# Altium PCB LM2587.PcbDoc
Units mm, origin at the board's own origin, x right, y up, seen from the top; angles counter-clockwise.
Board outline 56.6 x 28.6 mm, 2 copper layers (Top Layer, Bottom Layer), stack 1.571 mm thick; 11 components, 7 nets, 30 pads, 41 vias.
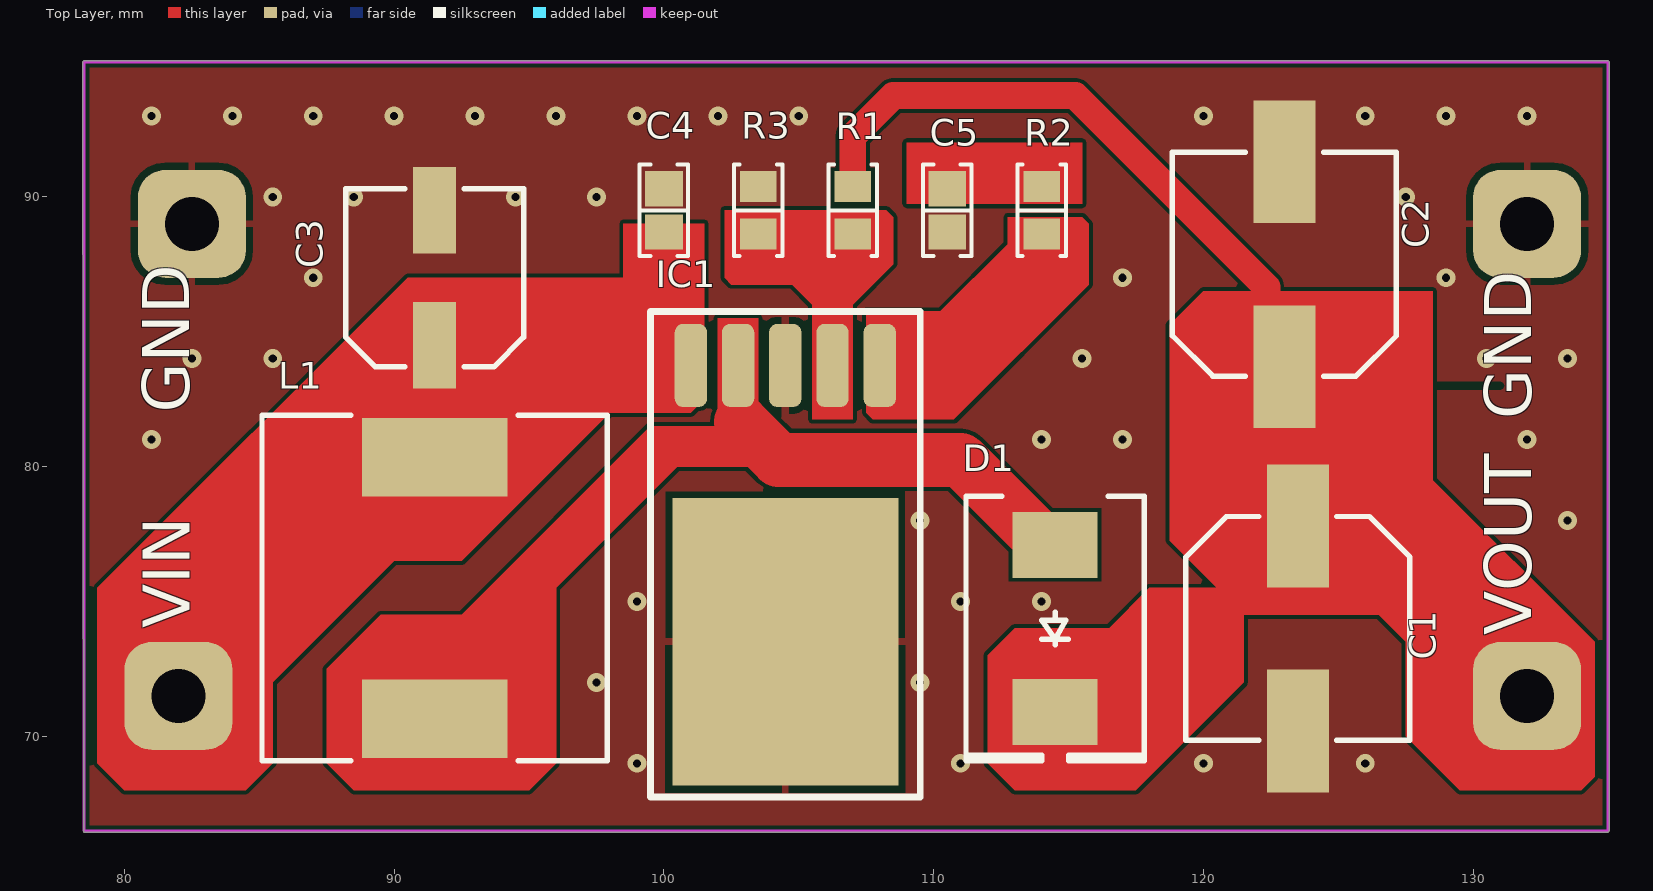
[diagram p0: Top Layer view]
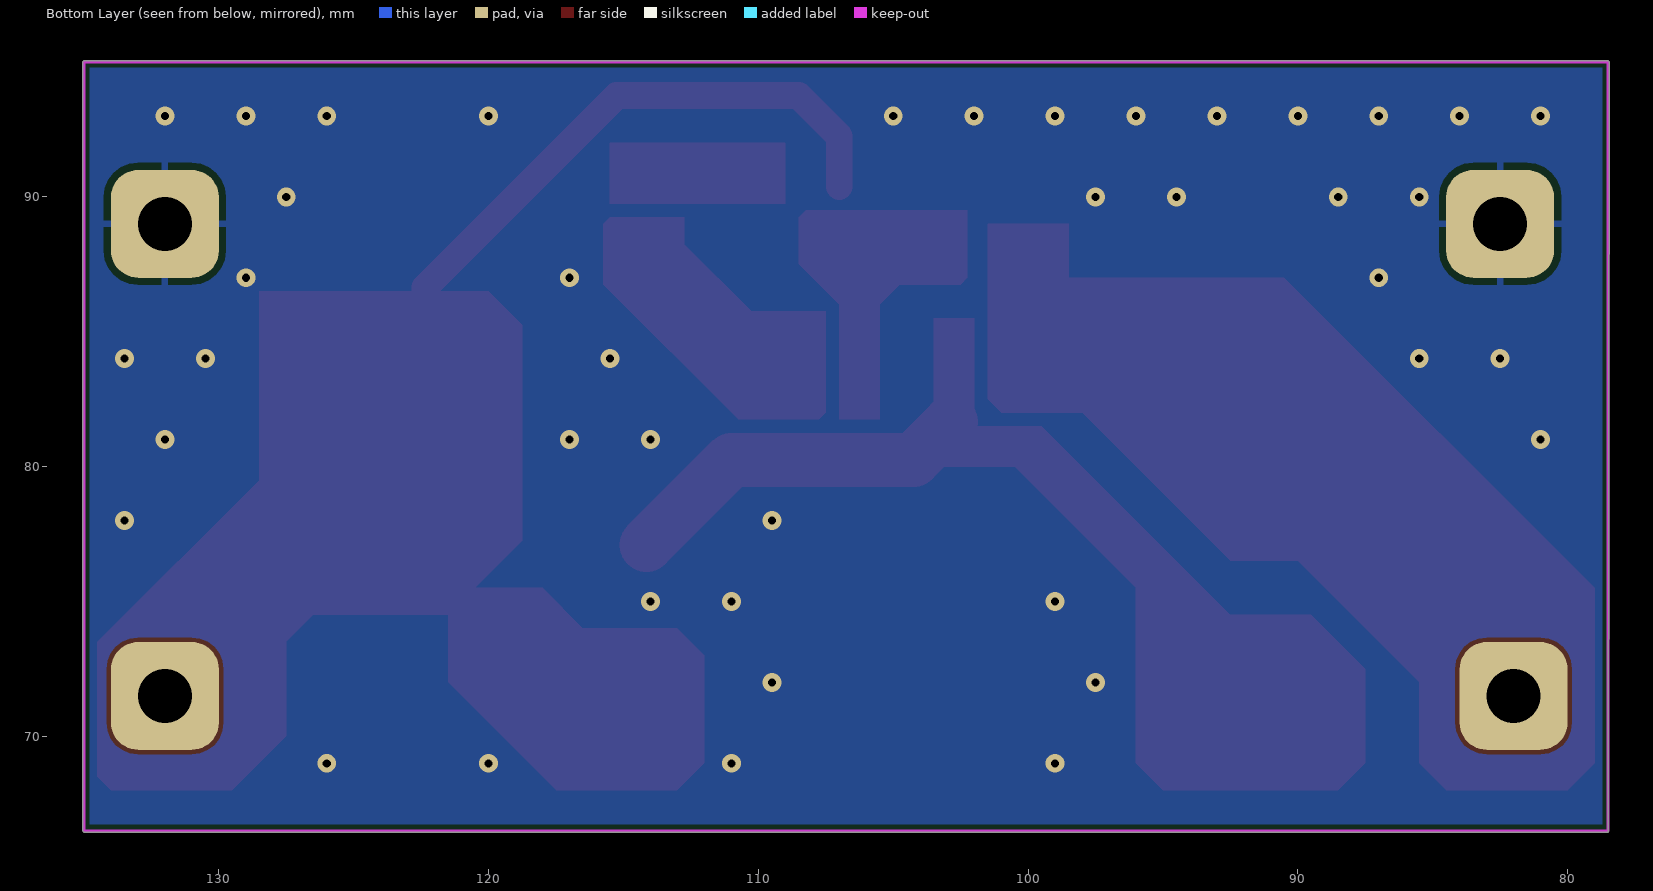
[diagram p1: Bottom Layer view, seen from below]
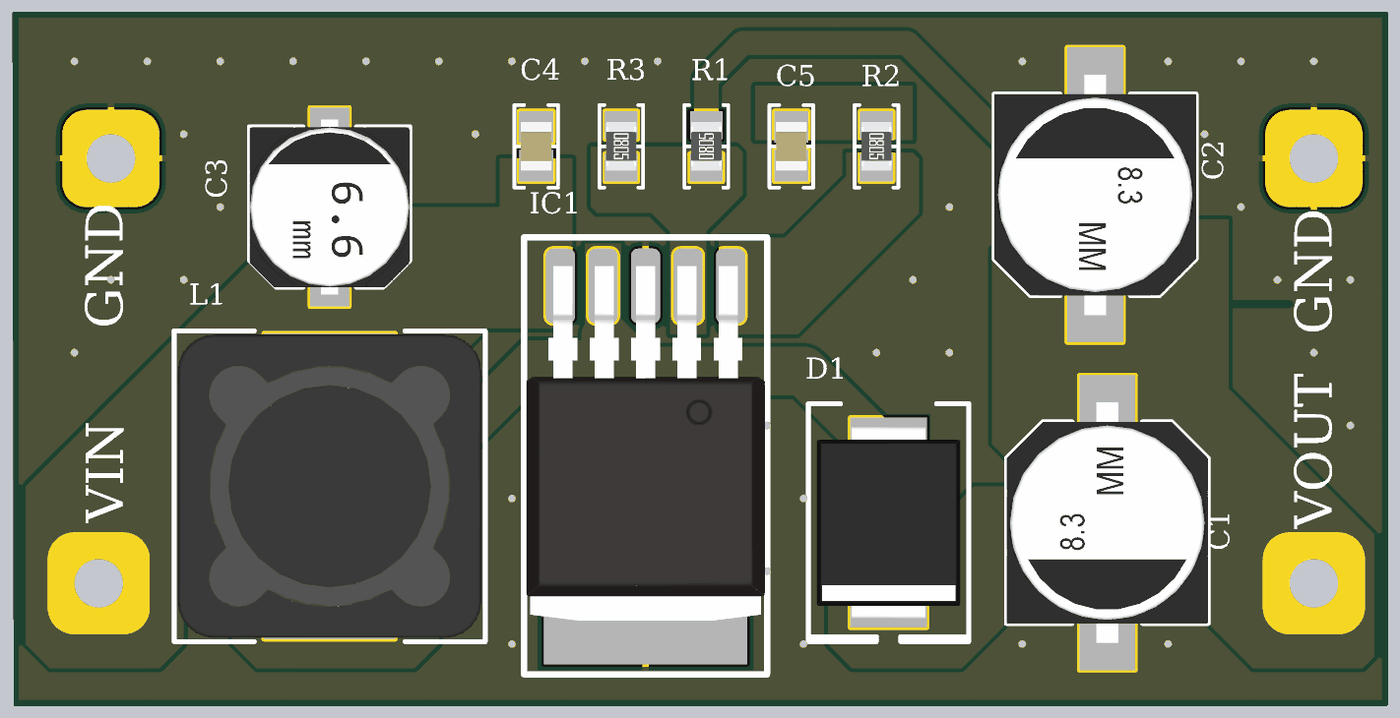
[diagram p2: 3D render of the assembled board from above, using the file's embedded part models]

## Layer stack, top to bottom
Top Solder: solder mask 0.0102, Solder Resist, Dk 3.5
Top Layer: signal copper 0.0356
Dielectric 1: dielectric 1.5, FR-4, Dk 4.8
Bottom Layer: signal copper 0.0356
Bottom Solder: solder mask 0.0102, Solder Resist, Dk 3.5

## Board outline
78.5,66.45 135,66.45 135.05,66.5 135.05,95 135,95.05 78.5,95.05 78.45,95

## Design rules (kind name [scope] priority, off if disabled: settings)
Clearance [All] p1: gap=0.152 ignorepadtopadclearanceinfootprint=FALSE
PolygonConnect [All] p1: connectstyle=Direct reliefconductorwidth=0.254 reliefentries=4 polygonreliefangle="90 Angle" airgapwidth=0.254
RoutingVias [All] p1: holewidth=0.711 width=1.27 viastyle="Through Hole" minholewidth=0.711 minwidth=1.27 maxholewidth=0.711 maxwidth=1.27
SolderMaskExpansion [All] p1: expansion=0.102 istentingtop=FALSE
SupplyNets "Schematic Supply Nets_2" [InNet('VOUT')] p1: voltage=0.000
SupplyNets "Schematic Supply Nets_1" [InNet('GND')] p2: voltage=0.000
SupplyNets "Schematic Supply Nets" [InNet('VIN')] p3: voltage=0.000
Width [All] p1: maxlimit=3 minlimit=0.152 preferedwidth=0.5
30 further rules are at their usual default settings.

## Components (designator, comment, footprint, x,y, rotation, side; value= is the part's Value field where it differs from the comment)
C1 "100 µF" "CAP ALSMD 8.3MM H10.5MM" 123.5,74 r270 top
C2 "100 µF" "CAP ALSMD 8.3MM H10.5MM" 123,87.5 r90 top
C3 "56 µF" "CAP ALSMD 6.6MM H7.7MM" 91.5,87 r90 top
C4 "0.1µF" "CAP 0805_2012" 100,89.5 r270 top
C5 "0.068 µF" "CAP 0805_2012" 110.5,89.5 r90 top
D1 "SURS8360T3G" "DO214AB SMC" 114.5,74 r270 top
IC1 "LM2587" D2PAK 104.5,75 r180 top
L1 "100 µH" "BOURNS SRR1280" 91.5,75.5 r270 top
R1 "56 kOhms" "RES 0805_2012" 107,89.5 r90 top
R2 "3 kOhms" "RES 0805_2012" 114,89.5 r270 top
R3 "2 kOhms" "RES 0805_2012" 103.5,89.5 r270 top

## Footprints (in the part's own frame and the unit in brackets; to place one, negate y for a bottom-side part, rotate by r counter-clockwise, add the part's x,y. Pads: shape width x height; smd on the part's side, far side on the other; paste and mask are expansions set on the pad)
"BOURNS SRR1280" [mm] "Precision Wire Wound Inductor, 2-Leads, Body 12.50x12.50mm, IPC Medium Density"
  rect 2.9x5.4 smd: 1(-4.85,0) 2(4.85,0)
  silkscreen extent -6.4,-6.4 6.4,6.4, body extent -6.25,-6.25 6.25,6.25, height 7.9
"CAP 0805_2012" [mm] "Chip Capacitor, 2-Leads, Body 2.00x1.20mm, IPC Medium Density"
  rect 1.3x1.4 smd: 1(-0.8,0) 2(0.8,0)
  silkscreen extent -1.7,-0.9 1.7,0.9, body extent -1,-0.64 1,0.64, height 1.26
"CAP ALSMD 6.6MM H7.7MM" [mm] "Aluminum Electrolytic Capacitor, Body 6.60x6.60x7.70mm, IPC Low Density"
  rect 3.2x1.6 smd: 1(-2.5,0) 2(2.5,0)
  silkscreen extent -3.3,-3.3 3.3,3.3, body extent -3.6,-3.3 3.6,3.3, height 7.7
"CAP ALSMD 8.3MM H10.5MM" [mm] "Aluminum Electrolytic Capacitor, Body 8.30x8.30x10.50mm, IPC Low Density"
  rect 4.55x2.3 smd: 1(-3.8,0) 2(3.8,0)
  silkscreen extent -4.15,-4.15 4.15,4.15, body extent -4.95,-4.15 4.95,4.15, height 10.5
D2PAK [mm] "LM2596 PACKAGE-263-5"
  rrect50% 1.2x3.075 smd: 1(-3.5,-8.75) 2(-1.75,-8.75) 3(0,-8.75) 4(1.75,-8.75) 5(3.5,-8.75)
  rect 8.38x10.66 smd: 3(0,1.5)
  silkscreen extent -5,-10.75 5,7.25, body extent -4.91,-9.56 4.91,5.04, height 4.22
"DO214AB SMC" [mm] "Molded Diode, 2-Leads, Body 6.85x5.90mm, IPC Medium Density"
  rect 2.45x3.15 smd: 1(-3.1,0) 2(3.1,0)
  silkscreen extent -4.9,-3.3 4.9,3.3, body extent -3.97,-2.95 3.97,2.95, height 2.6
"RES 0805_2012" [mm] "Chip Resistor, 2-Leads, Body 2.00x1.25mm, IPC Medium Density"
  rect 1.15x1.35 smd: 1(-0.875,0) 2(0.875,0)
  silkscreen extent -1.7,-0.9 1.7,0.9, body extent -1,-0.62 1,0.63, height 0.6

## Part data
C1 C2: library part 50SEV100M8X10.5, "CAP ALUM 100UF 20% 50V SMD", Device Package="Radial, Can - SMD", Lifetime @ Temp.="2000 Hrs @ 85°C", manufacturer=Rubycon, Operating Temperature="-40°C ~ 85°C", Ratings=AEC-Q200, Ripple Current @ Low Frequency="320 mA @ 120 Hz", Supplier Part Number 1=1189-3099-1-ND, Tolerance=±20%, Voltage - Rated="50 V", Applications=Automotive, Capacitance="100 µF", componentlink1description=Datasheet, componentlink1url=http://www.rubycon.co.jp/en/catalog/e_pdfs/aluminum/e_sev.pdf, componentlink2description="DigiKey Link", componentlink2url=https://www.digikey.com/en/products/detail/rubycon/50SEV100M8X10-5/3568700, Height - Seated (Max)="0.413\" (10.50mm)", lastupdated="3.06.2024 20:15:49", Lifecycle Status=Active, Minimum Order=1, Mounting Type="Surface Mount", Package / Case="Radial, Can - SMD", packaging=TapeAndReel, Part Number=50SEV100M8X10.5, Part Status=Active, partid=7462, Polarization=Polar, price=0.13, series=SEV, Size / Dimension="0.315\" Dia (8.00mm)", Supplier 1=DigiKey, Surface Mount Land Size="0.327\" L x 0.327\" W (8.30mm x 8.30mm)"
C3: library part 865080545010, "CAP ALUM 56UF 20% 35V SMD", Device Package="Radial, Can - SMD", Lifetime @ Temp.="2000 Hrs @ 105°C", manufacturer="Würth Elektronik", Operating Temperature="-55°C ~ 105°C", Ripple Current @ High Frequency="250 mA @ 100 kHz", Ripple Current @ Low Frequency="162.5 mA @ 120 Hz", Supplier Part Number 1=732-8509-1-ND, Tolerance=±20%, Voltage - Rated="35 V", Applications="General Purpose", Capacitance="56 µF", componentlink1description=Datasheet, componentlink1url=https://katalog.we-online.de/pbs/datasheet/865080545010.pdf, componentlink2description="DigiKey Link", componentlink2url=https://www.digikey.com/en/products/detail/würth-elektronik/865080545010/5728104, Height - Seated (Max)="0.303\" (7.70mm)", lastupdated="3.06.2024 20:16:17", Lifecycle Status=Active, Minimum Order=1, Mounting Type="Surface Mount", Package / Case="Radial, Can - SMD", packaging=TapeAndReel, Part Number=865080545010, Part Status=Active, partid=27342, Polarization=Polar, price=0.18, series=WCAP-ASLI, Size / Dimension="0.248\" Dia (6.30mm)", Supplier 1=DigiKey, Surface Mount Land Size="0.260\" L x 0.260\" W (6.60mm x 6.60mm)", Impedance="490 mOhms"
C4: library part 0805DC104MAT2A, "CAP CER 0.1UF 35V X7R 0805", Device Package="0805 (2012 Metric)", manufacturer="AVX Corporation", Operating Temperature="-55°C ~ 125°C", Supplier Part Number 1=478-0805DC104MAT2ACT-ND, Temperature Coefficient=X7R, Tolerance=±20%, Voltage - Rated=35V, Applications="General Purpose", Capacitance=0.1µF, componentlink1description=Datasheet, componentlink1url=http://datasheets.avx.com/X7RDielectric.pdf, componentlink2description="DigiKey Link", componentlink2url=http://digikey.com/product-detail/en/avx-corporation/0805DC104MAT2A/478-0805DC104MAT2ACT-ND/11570244, lastupdated="2.09.2020 01:04:04", Lifecycle Status=Active, Minimum Order=1, Mounting Type="Surface Mount, MLCC", Package / Case="0805 (2012 Metric)", packaging=TapeAndReel, Part Number=0805DC104MAT2A, Part Status=Active, partid=27767, price=0.05, series=-, Supplier 1=DigiKey
C5: library part 0805B683K500CT, "CAP CER 0.068UF 50V X7R 0805", Device Package="0805 (2012 Metric)", manufacturer="Walsin Technology Corporation", Operating Temperature="-55°C ~ 125°C", Supplier Part Number 1=1292-1588-1-ND, Temperature Coefficient=X7R, Tolerance=±10%, Voltage - Rated=50V, Applications="General Purpose", Capacitance="0.068 µF", componentlink1description=Datasheet, componentlink1url=http://www.passivecomponent.com/wp-content/uploads/2018/10/MLCC.pdf, componentlink2description="DigiKey Link", componentlink2url=https://www.digikey.com/en/products/detail/walsin-technology-corporation/0805B683K500CT/9355085, lastupdated="9.02.2024 20:15:39", Lifecycle Status=Active, Minimum Order=1, Mounting Type="Surface Mount, MLCC", Package / Case="0805 (2012 Metric)", packaging=TapeAndReel, Part Number=0805B683K500CT, Part Status=Active, partid=46958, price=0.01, series=-, Size / Dimension="0.079\" L x 0.049\" W (2.00mm x 1.25mm)", Supplier 1=DigiKey, Thickness (Max)="0.035\" (0.90mm)"
D1: "DIODE GEN PURP 600V 3A SMC", Current - Average Rectified (Io)=3A, Current - Reverse Leakage @ Vr="10µA @ 600V", manufacturer="ON Semiconductor", Operating Temperature - Junction="-65°C ~ 175°C", Package / Case="DO-214AB, SMC", Supplier Device Package=SMC, Supplier Part Number 1=SURS8360T3GOSCT-ND, Voltage - DC Reverse (Vr) (Max)=600V, Voltage - Forward (Vf) (Max) @ If="1.25V @ 3A", componentlink1description=Datasheet, componentlink1url=http://www.onsemi.com/pub/Collateral/MURS320T3-D.PDF, componentlink2description="DigiKey Link", componentlink2url=http://digikey.com/product-detail/en/on-semiconductor/SURS8360T3G/SURS8360T3GOSCT-ND/9087771, Diode Type=Standard, lastupdated="3.06.2024 19:54:15", Lifecycle Status=Active, Minimum Order=1, Mounting Type="Surface Mount", packaging=TapeAndReel, Part Number=SURS8360T3G, Part Status=Active, partid=348, price=0.30, Reverse Recovery Time (trr)=75ns, series=-, Speed="Fast Recovery =< 500ns, > 200mA (Io)", Supplier 1=DigiKey
IC1: "boost converter"
L1: library part SRR1280-101M, "FIXED IND 100UH 2.1A 150MOHM SMD", Current - Saturation=2A, Current Rating (Amps)="2.1 A", DC Resistance (DCR)="150mOhm Max", Device Package=Nonstandard, Frequency - Self Resonant=4.5MHz, manufacturer="Bourns Inc.", Operating Temperature="-40°C ~ 125°C", Q @ Freq="18 @ 796kHz", Supplier Part Number 1=118-SRR1280-101MCT-ND, Tolerance=±20%, Inductance Frequency - Test="100 kHz", componentlink1description=Datasheet, componentlink1url=https://www.bourns.com/docs/Product-Datasheets/SRR1280.pdf, componentlink2description="DigiKey Link", componentlink2url=https://www.digikey.com/en/products/detail/bourns-inc/SRR1280-101M/2127044, Height - Seated (Max)="0.315\" (8.00mm)", lastupdated="3.06.2024 20:02:37", Lifecycle Status=Active, Material - Core=Ferrite, Minimum Order=1, Mounting Type="Surface Mount", Package / Case=Nonstandard, packaging=TapeAndReel, Part Number=SRR1280-101M, Part Status=Active, partid=24, price=0.51, series=SRR1280, Shielding=Shielded, Size / Dimension="0.492\" L x 0.492\" W (12.50mm x 12.50mm)", Supplier 1=DigiKey, Type="Drum Core, Wirewound", Inductance="100 µH"
R1: library part 3430A2F56KTDF, "3430 A2 1% 56K 100PPM 1K RL", Device Package="0805 (2012 Metric)", manufacturer="TE Connectivity Passive Product", Operating Temperature="-55°C ~ 155°C", Power (Watts)=1W, Ratings=AEC-Q200, Supplier Device Package=0508, Supplier Part Number 1=1712-3430A2F56KTDFCT-ND, Temperature Coefficient=±100ppm/°C, Tolerance=±1%, componentlink2description="DigiKey Link", componentlink2url=https://www.digikey.com/en/products/detail/te-connectivity-passive-product/3430A2F56KTDF/17763313, Composition="Thick Film", Features="Automotive AEC-Q200", Height - Seated (Max)="0.026\" (0.65mm)", lastupdated="8.02.2024 21:00:08", Lifecycle Status=Active, Minimum Order=1, Number of Terminations=2, Package / Case="0805 (2012 Metric)", packaging=TapeAndReel, Part Number=3430A2F56KTDF, Part Status=Active, partid=76012, price=0.02, Resistance="56 kOhms", series=3430, Size / Dimension="0.049\" L x 0.079\" W (1.25mm x 2.00mm)", Supplier 1=DigiKey
R2: library part 3430A2F3K0TDF, "3430 A2 1% 3K0 100PPM 1K RL", Device Package="0805 (2012 Metric)", manufacturer="TE Connectivity Passive Product", Operating Temperature="-55°C ~ 155°C", Power (Watts)=1W, Ratings=AEC-Q200, Supplier Device Package=0508, Supplier Part Number 1=1712-3430A2F3K0TDFCT-ND, Temperature Coefficient=±100ppm/°C, Tolerance=±1%, componentlink2description="DigiKey Link", componentlink2url=https://www.digikey.com/en/products/detail/te-connectivity-passive-product/3430A2F3K0TDF/17763939, Composition="Thick Film", Features="Automotive AEC-Q200", Height - Seated (Max)="0.026\" (0.65mm)", lastupdated="8.02.2024 21:00:03", Lifecycle Status=Active, Minimum Order=1, Number of Terminations=2, Package / Case="0805 (2012 Metric)", packaging=TapeAndReel, Part Number=3430A2F3K0TDF, Part Status=Active, partid=77764, price=0.02, Resistance="3 kOhms", series=3430, Size / Dimension="0.049\" L x 0.079\" W (1.25mm x 2.00mm)", Supplier 1=DigiKey
R3: library part 3430A2F2K0TDF, "3430 A2 1% 2K0 100PPM 1K RL", Device Package="0805 (2012 Metric)", manufacturer="TE Connectivity Passive Product", Operating Temperature="-55°C ~ 155°C", Power (Watts)=1W, Ratings=AEC-Q200, Supplier Device Package=0508, Supplier Part Number 1=1712-3430A2F2K0TDFCT-ND, Temperature Coefficient=±100ppm/°C, Tolerance=±1%, componentlink2description="DigiKey Link", componentlink2url=https://www.digikey.com/en/products/detail/te-connectivity-passive-product/3430A2F2K0TDF/17763136, Composition="Thick Film", Features="Automotive AEC-Q200", Height - Seated (Max)="0.026\" (0.65mm)", lastupdated="8.02.2024 21:00:03", Lifecycle Status=Active, Minimum Order=1, Number of Terminations=2, Package / Case="0805 (2012 Metric)", packaging=TapeAndReel, Part Number=3430A2F2K0TDF, Part Status=Active, partid=77775, price=0.02, Resistance="2 kOhms", series=3430, Size / Dimension="0.049\" L x 0.079\" W (1.25mm x 2.00mm)", Supplier 1=DigiKey

## Free pads (board coordinates)
  rrect50% 4x4 hole 2: GND(82.5,89) GND(132,89) VIN(82,71.5) VOUT(132,71.5)

## Via types
v1: diameter 0.7, hole 0.3, Top Layer to Bottom Layer, tented both sides, 41 vias

## Nets (pads, with @x,y where several pads share a name; then routed paths per layer and width w, separated by ;. In a path a pad name is that pad's centre, name@x,y a point inside that pad or via, vN(x,y) a via of type N, cw(c..) or ccw(c..) an arc to the next point about the centre after c; other vN are vias at no path point)
GND: C1.2 C2.2 C3.2 C4.1 C5.1 IC1.3 pad.GND R3.1
  other v1: 99,69 111,69 120,69 126,69 97.5,72 109.5,72 99,75 111,75 114,75 109.5,78 133.5,78 81,81 114,81 117,81 132,81 82.5,84 85.5,84 115.5,84 130.5,84 133.5,84 87,87 117,87 129,87 85.5,90 88.5,90 94.5,90 97.5,90 127.5,90 81,93 84,93 87,93 90,93 93,93 96,93 99,93 102,93 105,93 120,93 126,93 129,93 132,93
NetC5_2: C5.2 R2.1
NetD1_1: D1.1 IC1.4 L1.2 | length 15.7
  Top Layer w1: IC1.4 102.85,83.65 102.85,81.65 ; D1.1@114.15,77.1 D1.1
  Top Layer w2: 102.85,81.65 104.25,80.25 111,80.25 D1.1@114.15,77.1
NetR1_1: IC1.2 R1.1 R3.2
NetR2_2: IC1.1 R2.2
VIN: C3.1 C4.2 IC1.5 L1.1 pad.VIN
VOUT: C1.1 C2.1 D1.2 pad.VOUT R1.2 | length 24
  Top Layer w1: R1.2 107,92.25 108.5,93.75 115.25,93.75 122.35,86.65 122.35,84.35 C2.1

## Polygon pours and split planes (outlines as drawn)
GND on Top Layer "GND_L01_P000" (solid, pour order 0): 78.5,95 135,95 135,66.5 78.5,66.5
GND on Bottom Layer "GND_L02_P001" (solid, pour order 1): 78.5,95 135,95 135,66.75 78.5,66.75

## Keep-outs
Keep-Out Layer:
  lines w0.1: 79.5,95 135,95 135,66.5 78.5,66.5 78.5,95 80,95

## Other copper
Top Layer:
  region net NetR2_2: 112.75,89.25 112.75,88.25 110.25,85.75 107.5,85.75 107.5,82 107.75,81.75 110.75,81.75 115.75,86.75 115.75,89 115.5,89.25
  region net NetR1_1: 102.25,89.5 108.25,89.5 108.5,89.25 108.5,87.5 107,86 107,81.75 105.5,81.75 105.5,86 104.75,86.75 102.5,86.75 102.25,87
  region net NetC5_2: 109,92 109,89.75 115.5,89.75 115.5,92
  region net VIN: 98.5,89 101.5,89 101.5,82.5 101,82 98,82 92.5,76.5 90,76.5 85.5,72 85.5,69 84.5,68 80,68 79,69 79,75.5 90.5,87 98.5,87
  region net NetD1_1: 103.5,80 100.5,80 96,75.5 96,69 95,68 88.5,68 87.5,69 87.5,72.5 89.5,74.5 92.5,74.5 99.5,81.5 102,81.5 102,85.5 103.5,85.5 102,85.5 103.5,85.5
  region net VOUT: 120.5,75.5 118,75.5 116.5,74 113,74 112,73 112,69 113,68 117.5,68 121.5,72 121.5,74.5
  region net VOUT: 128.5,86.5 128.5,79.5 134.5,73.5 134.5,68.5 134,68 129.5,68 127.5,70 127.5,73.5 126.5,74.5 121.5,74.5 118.75,77.25 118.75,85.25 120,86.5
  region net VOUT: 128.5,83 131,83

## Silkscreen, mask and mechanical layers (free items; w line width, h text height)
Top Overlay:
  text "GND" at 82.978,82 h3 r90
  text "GND" at 132.728,81.75 h3 r90
  text "VIN" at 82.992,74 h3 r90
  text "VOUT" at 132.728,73.75 h3 r90